# EAGLE board reveller-pi-B+HAT (EAGLE 7.5.0)

Size 65 x 56 mm. Coordinates in mm from the lower left corner, seen from the top.
Copper layers (1*16): Top 0.035mm / dielectric 1.5mm / Bottom 0.035mm
Design rules "default *": minimum track width 0.25mm, minimum drill 0.8mm, track to track 0.5mm, track to pad 8mil, pad to pad 8mil, via to via 8mil, smd to smd 8mil, copper to edge 40mil, drill to drill 8mil, minimum pad ring 0.2mm, minimum via ring 8mil, stop-mask expansion 4mil, vias tented up to drill 0mil, thermal gap 10mil
Net classes: 0 default: clearance 0.205 mm; 1 data: width 0.3 mm, drill 0.8 mm

## Footprints (pad centres in the part's own frame; a part is rotated, then mirrored left to right if it is on the bottom)
SMD-IPC_C1206 = smd 1.15 x 1.8: + 1.5,0; - -1.5,0
PXE-H = smd 3.3 x 1.5: + 3.4,0; - -3.4,0
SMD-IPC_CT7343 = smd 2.45 x 2.45: + -3.1,0; - 3.1,0
DIL28-6 = drill 0.813 long: 1 -16.51,-7.62; 2 -13.97,-7.62; 3 -11.43,-7.62; 4 -8.89,-7.62; 5 -6.35,-7.62; 6 -3.81,-7.62; 7 -1.27,-7.62; 8 1.27,-7.62; 9 3.81,-7.62; 10 6.35,-7.62; 11 8.89,-7.62; 12 11.43,-7.62; 13 13.97,-7.62; 14 16.51,-7.62; 15 16.51,7.62; 16 13.97,7.62; 17 11.43,7.62; 18 8.89,7.62; 19 6.35,7.62; 20 3.81,7.62; 21 1.27,7.62; 22 -1.27,7.62; 23 -3.81,7.62; 24 -6.35,7.62; 25 -8.89,7.62; 26 -11.43,7.62; 27 -13.97,7.62; 28 -16.51,7.62
TO220BV = drill 1.016 long: D 0,-2.54; G -2.54,-2.54; S 2.54,-2.54
SMD-IPC_R1206 = smd 1.6 x 1.803: 1 -1.422,0; 2 1.422,0
TO92 = drill 0.813 octagon: 1 1.27,0; 2 0,1.905; 3 -1.27,0
RASPI_BOARD_B+HAT_DF_CF = drill 1 pad 1.778 square: 1 8.37,51.23 | drill 1 pad 1.778: 2 8.37,53.77; 3 10.91,51.23; 4 10.91,53.77; 5 13.45,51.23; 6 13.45,53.77; 7 15.99,51.23; 8 15.99,53.77; 9 18.53,51.23; 10 18.53,53.77; 11 21.07,51.23; 12 21.07,53.77; 13 23.61,51.23; 14 23.61,53.77; 15 26.15,51.23; 16 26.15,53.77; 17 28.69,51.23; 18 28.69,53.77; 19 31.23,51.23; 20 31.23,53.77; 21 33.77,51.23; 22 33.77,53.77; 23 36.31,51.23; 24 36.31,53.77; 25 38.85,51.23; 26 38.85,53.77; 27 41.39,51.23; 28 41.39,53.77; 29 43.93,51.23; 30 43.93,53.77; 31 46.47,51.23; 32 46.47,53.77; 33 49.01,51.23; 34 49.01,53.77; 35 51.55,51.23; 36 51.55,53.77; 37 54.09,51.23; 38 54.09,53.77; 39 56.63,51.23; 40 56.63,53.77 | hole 2.75: 3.5,3.5; 3.5,52.5; 61.5,3.5; 61.5,52.5
PG203J = drill 1.499 octagon: 1 -5.004,-0.203; 4 5.74,-4.369; 5 -1.753,-4.902 | drill 1.499: 2 2.845,4.902; 3 1.448,2.388
22-23-2041 = drill 1 long: 1 -3.81,0; 2 -1.27,0; 3 1.27,0; 4 3.81,0

## Placement (x,y rotation side)
C100  100nF  [SMD-IPC_C1206]  90.81,45.34 90 top  (outside the outline)
C101  1nF  [SMD-IPC_C1206]  89.15,10.41 90 bottom  (outside the outline)
C102  1uF  [PXE-H]  51.56,6.48 270 top
C103  470pF  [SMD-IPC_C1206]  43.56,41.02 0 bottom
C104  470pF  [SMD-IPC_C1206]  48.7,40.96 0 bottom
C105  10uF  [SMD-IPC_CT7343]  62.61,16.13 270 top
C106  10uF  [SMD-IPC_CT7343]  58.55,15.75 270 top
C107  100nF  [SMD-IPC_C1206]  75.56,14.86 0 top  (outside the outline)
C108  100nF  [SMD-IPC_C1206]  77.6,6.35 0 top  (outside the outline)
IC100  6581  [DIL28-6]  33.4,30.23 180 top
Q100  IRF9Z24N  [TO220BV]  58.04,41.91 90 top
R100  1K  [SMD-IPC_R1206]  89.41,16 180 bottom  (outside the outline)
R101  1k  [SMD-IPC_R1206]  99.19,17.53 0 top  (outside the outline)
R102  3.3k  [SMD-IPC_R1206]  82.04,32.13 0 top  (outside the outline)
R103  0R  [SMD-IPC_R1206]  79.63,36.58 180 bottom  (outside the outline)
R104  10K  [SMD-IPC_R1206]  77.6,25.91 90 bottom  (outside the outline)
R105  NM*  [SMD-IPC_R1206]  88.9,35.31 180 bottom  (outside the outline)
R106  4.7  [SMD-IPC_R1206]  71.75,27.94 90 top  (outside the outline)
R107  4.7  [SMD-IPC_R1206]  68.45,18.8 90 top  (outside the outline)
T100  BC547  [TO92]  8.76,24.89 90 top
X1  RASPI_BOARD_B+#_HDC  [RASPI_BOARD_B+HAT_DF_CF]  0,0 0 top
X101  PG203J  [PG203J]  26.42,7.11 89.9 top
X102  CANTON-POWER  [22-23-2041]  4.32,42.8 270 top

## Library data of the parts
C100-C108 = cyviz
IC100 = ic-package
Q100 = transistor-power
R100-R107 = cyviz; SIZE: 1206
T100 = transistor
X1 = raspberrypi_bastelstube_v13
X101 = con-hirschmann; OC_FARNELL: unknown; OC_NEWARK: unknown
X102 = con-molex; MF: MOLEX; MPN: 22-23-2041; OC_FARNELL: 1462920; OC_NEWARK: 38C0355

## Nets
3V3A: X1.1
3V3B: X1.17
+5V: Q100.S R105.2 R106.2 R107.2 X1.2 X1.4
+5V_SID: C106.+ C108.+ IC100.25 Q100.D R102.2
+12V: C105.+ C107.+ IC100.28 T100.3 X102.1
A0 [data]: IC100.9
A1 [data]: IC100.10
A2 [data]: IC100.11
A3 [data]: IC100.12
A4 [data]: IC100.13
AUDIO_DC: C102.+ R101.1 T100.1
AUDIO_OUT: C102.- X101.2 X101.5
AUDIO_PREAMP: R100.2 R103.2 R104.1
AUDIO_PREAMP_B: R104.2 T100.2
AUDIO_RAW: IC100.27 R103.1
CAP1A: C104.- IC100.1
CAP1B: C104.+ IC100.2
CAP2A: C103.- IC100.3
CAP2B: C103.+ IC100.4
CAPX: C101.+ IC100.26
CLK [data]: IC100.6 X1.12
CS [data]: IC100.8 X1.7
D0 [data]: IC100.15 X1.3
D1 [data]: IC100.16 X1.5
D2 [data]: IC100.17 X1.8
D3 [data]: IC100.18 X1.10
D4 [data]: IC100.19 X1.15
D5 [data]: IC100.20 X1.16
D6 [data]: IC100.21 X1.18
D7 [data]: IC100.22 X1.22
GND: C100.+ C101.- C105.- C106.- C107.- C108.- IC100.14 R100.1 R101.2 X101.1 X102.2
GND_A: X1.6
GND_B: X1.9
GND_C: X1.14
GND_D: X1.20
GND_E: X1.25
GND_F: X1.30
GND_G: X1.34
GND_H: X1.39
N$1: R106.1 R107.1 X102.4
PWCTL [data]: Q100.G R105.1 X1.13 X102.3
RESET: C100.- IC100.5 R102.1
RW [data]: IC100.7 X1.11

## Tracks (layer width: path | path; a pad name or v marks a point on that pad's centre or on a via)
+5V  (5 unrouted)
+5V_SID  (4 unrouted)
+12V  (4 unrouted)
AUDIO_DC  (2 unrouted)
AUDIO_OUT  (2 unrouted)
AUDIO_PREAMP  (2 unrouted)
AUDIO_PREAMP_B  (1 unrouted)
AUDIO_RAW  (1 unrouted)
CAP1A  (1 unrouted)
CAP1B  (1 unrouted)
CAP2A  (1 unrouted)
CAP2B  (1 unrouted)
CAPX  (1 unrouted)
CLK  (1 unrouted)
CS  (1 unrouted)
D0  (1 unrouted)
D1  (1 unrouted)
D2  (1 unrouted)
D3  (1 unrouted)
D4  (1 unrouted)
D5  (1 unrouted)
D6  (1 unrouted)
D7  (1 unrouted)
GND  (10 unrouted)
N$1  (2 unrouted)
PWCTL  (3 unrouted)
RESET  (2 unrouted)
RW  (1 unrouted)